# Altium PCB HV.PcbDoc (part 2 of 2)
Units mil, origin at the board's own origin, x right, y up, seen from the top; angles counter-clockwise.
Board outline 2765.94 x 3947.04 mil, 2 copper layers (Top Layer, Bottom Layer); 98 components, 67 nets, 300 pads, 27 vias.
Unrouted connection lines stored in the file: 3.
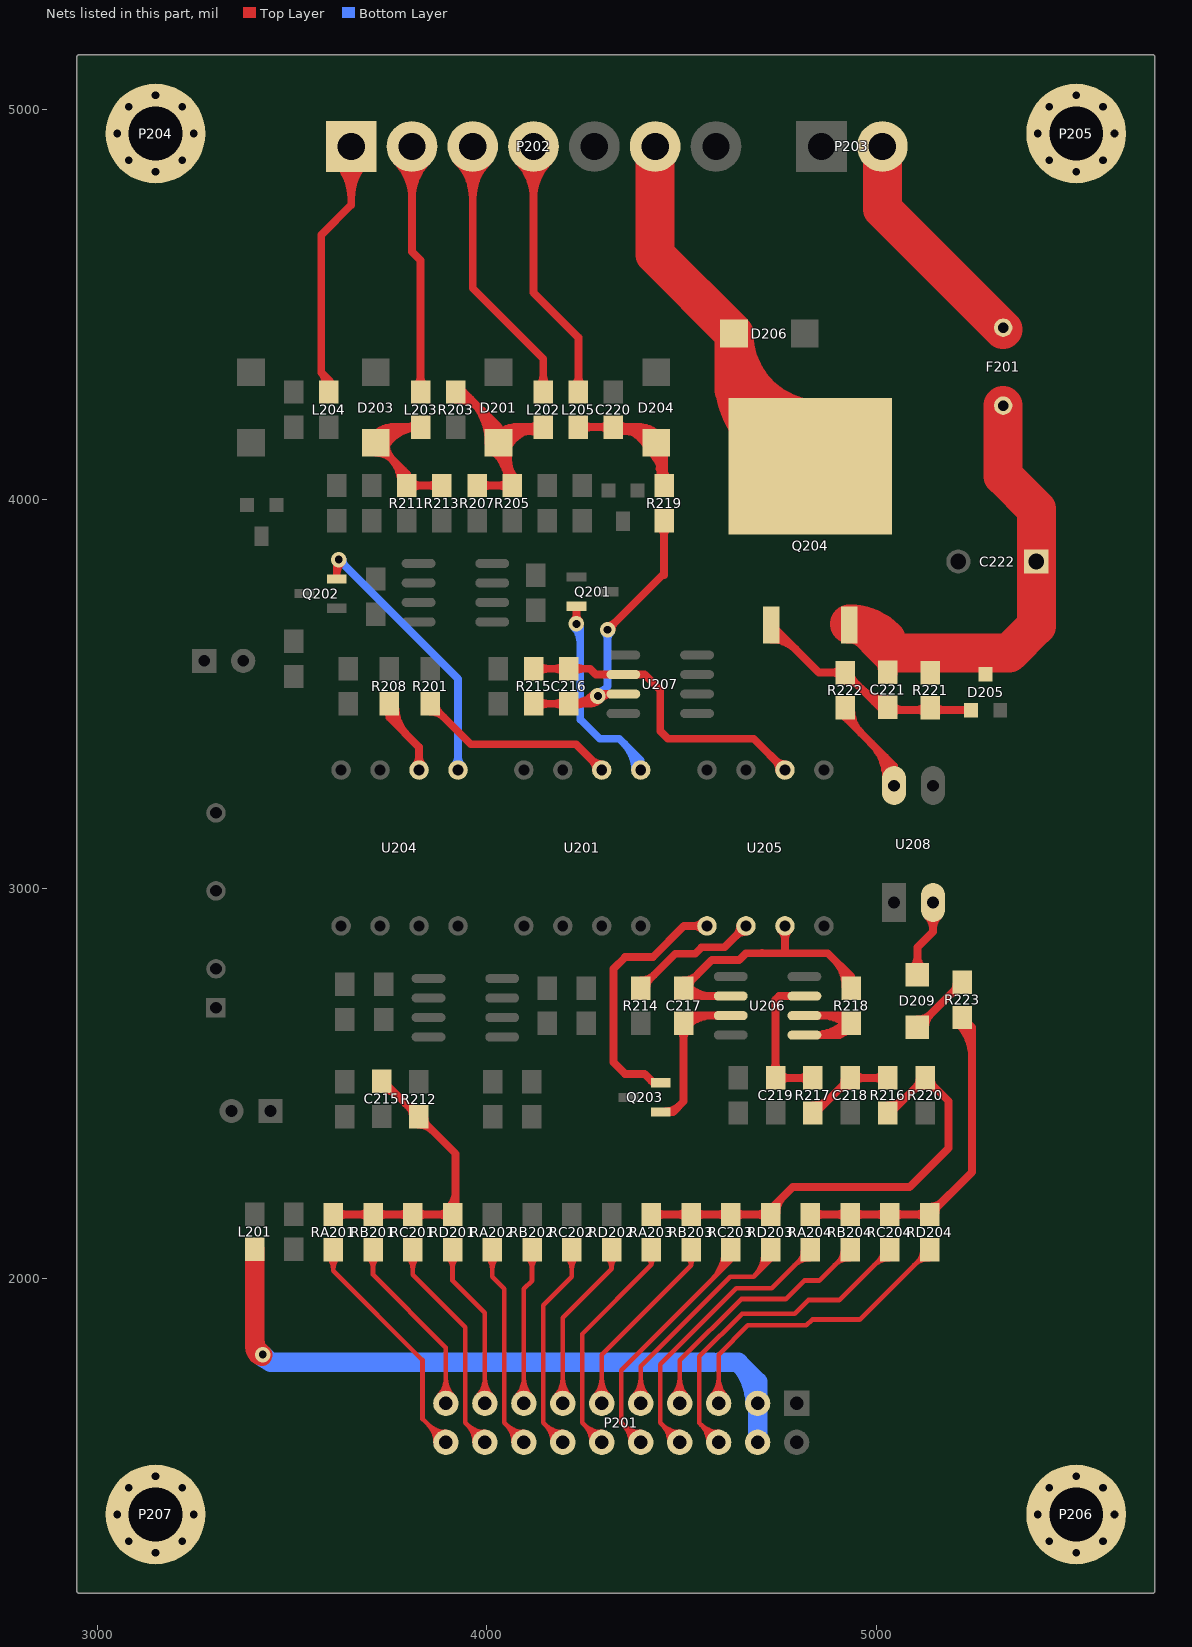
[diagram p2: the nets of this part, all layers, seen from the top]

## Via types
v1: diameter 40, hole 20, Top Layer to Bottom Layer, 26 vias
v2: diameter 50, hole 28, Top Layer to Bottom Layer, 1 vias

## Nets (pads, with @x,y where several pads share a name; then routed paths per layer and width w, separated by ;. In a path a pad name is that pad's centre, name@x,y a point inside that pad or via, vN(x,y) a via of type N, cw(c..) or ccw(c..) an arc to the next point about the centre after c; other vN are vias at no path point) (continued)
NetC215_2: C215.2 R212.2 RA201.1 RB201.1 RC201.1 RD201.1 | length 1282.1
  Top Layer w20: RA201.1@3606.1,2164.45 RB201.1@3708.1,2164.45 RC201.1@3810.1,2164.45 RD201.1@3912.1,2164.45 3920,2172.35 3920,2320 R212.2@3825,2415 3734,2506 C215.2@3730,2506 ; RA201.1@3616.71,2153.84 cw(c3642.32,2128.24) 3642.32,2164.45 cw(c3642.32,2200.66) RA201.1@3616.71,2175.06 ; RB201.1@3697.5,2153.84 ccw(c3671.89,2128.24) 3671.89,2164.45 ccw(c3671.89,2200.66) RB201.1@3697.5,2175.06 ; RB201.1@3718.71,2153.84 cw(c3744.32,2128.24) 3744.32,2164.45 cw(c3744.32,2200.66) RB201.1@3718.71,2175.06 ; C215.2@3730,2486 cw(c3730,2428.06) 3770.97,2469.03 ; 3790.86,2449.14 ccw(c3825,2483.28) R212.2@3825,2435 ; RC201.1@3799.5,2153.84 ccw(c3773.89,2128.24) 3773.89,2164.45 ccw(c3773.89,2200.66) RC201.1@3799.5,2175.06 ; R212.2@3802.93,2437.07 cw(c3785.86,2420) R212.2@3810,2420 ; RC201.1@3820.71,2153.84 cw(c3846.32,2128.24) 3846.32,2164.45 cw(c3846.32,2200.66) RC201.1@3820.71,2175.06 ; R212.2@3825,2395 cw(c3825,2346.72) 3859.14,2380.86 ; R212.2@3840,2410 ccw(c3864.14,2410) R212.2@3847.07,2392.93 ; RD201.1@3901.5,2153.84 ccw(c3875.89,2128.24) 3875.89,2164.45 ccw(c3875.89,2200.66) RD201.1@3901.5,2175.06 ; RD201.1@3901.5,2180.06 ccw(c3856.82,2224.73) 3920,2224.73
NetC216_1: C216.1 R215.2 U205.6 U207.6 | length 1016.7
  Top Layer w20: R215.2@4130.61,3554.39 cw(c4156.21,3528.79) 4156.21,3565 cw(c4156.21,3601.21) R215.2@4130.61,3575.61 ; 4145,3565 C216.1@4210,3565 4265,3565 4280,3550 U207.6@4350.51,3550 4405,3550 4445,3510 4445,3405 4465,3385 4685,3385 U205.6@4765,3305 ; C216.1@4199.39,3554.39 ccw(c4173.79,3528.79) 4173.79,3565 ccw(c4173.79,3601.21) C216.1@4199.39,3575.61 ; C216.1@4220.61,3554.39 cw(c4246.21,3528.79) 4246.21,3565 cw(c4246.21,3601.21) C216.1@4220.61,3575.61 ; U205.6@4750,3305 ccw(c4713.79,3305) 4739.39,3330.61 ccw(c4765,3356.21) U205.6@4765,3320
NetC216_2: C216.2 R215.1 R219.1 U207.7 | length 1295.1
  Top Layer w20: R215.1@4120,3475 C216.2@4210,3475 4265,3475 v1(4285,3495) ; R215.1@4130.61,3464.39 cw(c4156.21,3438.79) 4156.21,3475 cw(c4156.21,3511.21) R215.1@4130.61,3485.61 ; C216.2@4199.39,3464.39 ccw(c4173.79,3438.79) 4173.79,3475 ccw(c4173.79,3511.21) C216.2@4199.39,3485.61 ; C216.2@4212.57,3475 ccw(c4212.57,3567.43) v1@4277.93,3502.07 ; C216.2@4220.61,3464.39 cw(c4246.21,3438.79) 4246.21,3475 cw(c4246.21,3511.21) C216.2@4220.61,3485.61 ; 4260.86,3475 ccw(c4260.86,3519.14) 4292.07,3487.93 cw(c4321.21,3458.79) U207.7@4321.21,3500 ; v1@4275,3495 cw(c4250.86,3495) 4267.93,3477.93 cw(c4285,3460.86) v1@4285,3485 ; v1(4310,3665) 4455,3810 ; v1@4310,3675 ccw(c4310,3699.14) 4327.07,3682.07 ccw(c4344.14,3665) v1@4320,3665 ; U207.7@4350.51,3500 v1@4290,3500 ; R219.1@4444.39,3929.39 cw(c4418.79,3903.79) 4455,3903.79 cw(c4491.21,3903.79) R219.1@4465.61,3929.39 ; 4455,3805 4455,3810 ; R219.1@4455,3945 4455,3810 ; v1(4285,3495) v1@4290,3500 ; v1(4285,3495) 4285,3500 v1@4290,3500
  Bottom Layer w20: v1(4285,3495) 4310,3520 v1(4310,3665) ; v1@4285,3505 ccw(c4285,3529.14) 4302.07,3512.07 ccw(c4319.14,3495) v1@4295,3495 ; v1@4302.93,3657.93 cw(c4285.86,3640.86) 4310,3640.86 cw(c4334.14,3640.86) v1@4317.07,3657.93
NetC217_1: C217.1 R218.1 U205.3 U206.6 | length 1080.1
  Top Layer w20: C217.1@4501.46,2736.46 ccw(c4529.14,2764.14) C217.1@4529.14,2725 ; C217.1@4505,2765 ccw(c4505,2813.28) 4539.14,2779.14 ; C217.1@4515.61,2750.61 ccw(c4577.43,2812.43) 4577.43,2725 ; C217.1@4520,2750 cw(c4544.14,2750) C217.1@4527.07,2767.07 ; U206.6@4626.02,2725 4525,2725 C217.1@4505,2745 4577.5,2817.5 4647.5,2817.5 4665,2835 4705,2835 ; 4706.18,2836.18 4705,2835 ; U205.3@4754.39,2894.39 cw(c4728.79,2868.79) 4765,2868.79 cw(c4801.21,2868.79) U205.3@4775.61,2894.39 ; U205.3@4765,2905 4765,2835 ; 4891.59,2818.41 cw(c4823.02,2749.83) R218.1@4920,2749.83 ; 4925.74,2784.26 cw(c4891.3,2749.83) R218.1@4940,2749.83 ; R218.1@4927.86,2763.02 ccw(c4921.38,2775) 4935,2775 ; R218.1@4935,2744.83 4935,2775 ; R218.1@4942.14,2763.02 cw(c4948.62,2775) 4935,2775 ; 4705,2835 4765,2835 ; 4765,2835 4875,2835 4935,2775
NetC217_2: C217.2 Q203.1 U206.7 | length 598.9
  Top Layer w20: Q203.1@4446.34,2427.6 4477.6,2427.6 4505,2455 C217.2@4505,2655 ; Q203.1@4460.12,2429.41 ccw(c4460.12,2475.98) 4493.05,2443.05 ; C217.2@4494.39,2639.39 cw(c4468.79,2613.79) 4505,2613.79 cw(c4541.21,2613.79) C217.2@4515.61,2639.39 ; C217.2@4501.46,2663.54 cw(c4529.14,2635.86) C217.2@4529.14,2675 ; C217.2@4505,2661.72 C217.2@4505,2655 ; C217.2@4515.61,2649.39 cw(c4577.43,2587.57) 4577.43,2675 ; U206.7@4626.02,2675 4525,2675 C217.2@4505,2655
NetC218_2: C218.2 R216.1 R217.2 | length 449.6
  Top Layer w20: R217.2@4837,2425 4843.17,2425 4933.17,2515 R216.1@5029,2515 ; R217.2@4837,2445 ccw(c4837,2508.18) 4881.68,2463.51 ; 4899.44,2481.27 cw(c4933,2447.72) C218.2@4933,2495.17 ; C218.2@4910.69,2492.51 ccw(c4893.03,2510.17) C218.2@4918,2510.17 ; C218.2@4943.61,2504.57 cw(c4968.8,2479.37) 4968.8,2515 ; C218.2@4943.61,2525.78 ccw(c4969.63,2551.8) 4969.63,2515 ; R216.1@5018.39,2504.39 ccw(c4992.79,2478.79) 4992.79,2515 ccw(c4992.79,2551.21) R216.1@5018.39,2525.61
NetC219_2: C219.2 R217.1 U206.3 | length 545.3
  Top Layer w20: C219.2@4730.39,2530.78 ccw(c4704.79,2556.38) 4741,2556.38 ccw(c4777.21,2556.38) C219.2@4751.61,2530.78 ; C219.2@4751.61,2504.57 cw(c4776.8,2479.37) 4776.8,2515 ; C219.2@4751.61,2525.78 ccw(c4777.63,2551.8) 4777.63,2515 ; U206.3@4815,2725 4750,2725 4741,2716 C219.2@4741,2515.17 4741.17,2515 R217.1@4837,2515 ; R217.1@4826.39,2504.39 ccw(c4800.79,2478.79) 4800.79,2515 ccw(c4800.79,2551.21) R217.1@4826.39,2525.61
NetC220_2: C220.2 D204.1 L205.2 R219.2 | length 1200.4
  Top Layer w20: L205.2@4235,4185 C220.2@4325,4185 ; L205.2@4245.61,4174.39 cw(c4271.21,4148.79) 4271.21,4185 cw(c4271.21,4221.21) L205.2@4245.61,4195.61 ; C220.2@4314.39,4174.39 ccw(c4288.79,4148.79) 4288.79,4185 ccw(c4288.79,4221.21) C220.2@4314.39,4195.61 ; C220.2@4333.79,4167.84 cw(c4356.5,4136.41) 4366.54,4173.87 ; C220.2@4335.61,4174.39 cw(c4361.21,4148.79) 4361.21,4185 cw(c4361.21,4221.21) C220.2@4335.61,4195.61 ; C220.2@4337.99,4187.5 ccw(c4355.07,4197.36) C220.2@4349.96,4178.31 ; 4358.34,4185 cw(c4358.34,4103.55) D204.1@4430.21,4141.89 ; 4391.68,4185 cw(c4391.68,4121.34) D204.1@4447.85,4151.31 ; D204.1@4409.6,4145.71 ccw(c4357.73,4148.28) 4394.45,4185 ; D204.1@4412.56,4132.48 ccw(c4325,4085.76) C220.2@4325,4185 ; D204.1@4417.02,4126.46 cw(c4325.31,4034.76) R219.2@4455,4034.76 ; D204.1@4431.16,4140.61 cw(c4373.6,4083.05) 4455,4083.05 ; D204.1@4433.74,4169.85 cw(c4431.17,4221.72) 4394.45,4185 ; D204.1@4435,4125 D204.1@4435,4140 ; R219.2@4442.01,4047.5 ccw(c4414.66,4063.29) 4445.17,4071.47 ; 4443.47,4077.79 ccw(c4482.92,4088.36) R219.2@4462.5,4052.99 ; R219.2@4444.39,4050.61 ccw(c4418.79,4076.21) 4455,4076.21 ccw(c4491.21,4076.21) R219.2@4465.61,4050.61 ; R219.2@4455,4035 4455,4120 D204.1@4435,4140 ; C220.2@4325,4185 4394.45,4185 ; 4394.45,4185 D204.1@4435,4144.45 D204.1@4435,4140
NetC221_1: C221.1 D205.1 Q204.1 R221.1 R222.1 | length 1132.5
  Top Layer w20: Q204.1@4730,3640.04 cw(c4730,3550.12) 4793.58,3613.7 ; Q204.1@4730,3660.04 cw(c4730,3618.41) 4759.44,3647.85 ; Q204.1@4730,3677.28 4852.28,3555 R222.1@4920,3555 5009,3466 C221.1@5028.63,3466 ; R222.1@4909.39,3544.39 ccw(c4883.79,3518.79) 4883.79,3555 ccw(c4883.79,3591.21) R222.1@4909.39,3565.61 ; R222.1@4920,3535 cw(c4920,3486.72) 4954.14,3520.86 ; R222.1@4935,3550 ccw(c4959.14,3550) R222.1@4942.07,3532.93 ; 4960.98,3514.02 ccw(c5028.63,3581.67) C221.1@5028.63,3486 ; 4995.12,3479.88 ccw(c5028.63,3513.38) C221.1@5028.63,3466 ; C221.1@5039.23,3450.39 cw(c5059.39,3430.24) 5059.39,3458.74 ; C221.1@5039.23,3471.61 ccw(c5070.3,3502.67) 5070.3,3458.74 ; 5098,3458.74 ccw(c5098,3499.25) R221.1@5126.65,3470.61 ; 5104.08,3458.74 cw(c5104.08,3426.83) R221.1@5126.65,3449.39 ; R221.1@5147.86,3449.39 cw(c5170.43,3426.83) 5170.43,3458.74 ; R221.1@5147.86,3470.61 ccw(c5176.51,3499.25) 5176.51,3458.74 ; D205.1@5237.14,3453.28 ccw(c5223.97,3440.11) 5223.97,3458.74 ccw(c5223.97,3477.37) D205.1@5237.14,3464.2 ; D205.1@5242.6,3458.74 5035.89,3458.74 C221.1@5028.63,3466
NetC221_2: C221.2 C222.1 D205.3 F201.2 Q204.3 R221.2 | length 1342.6
  Top Layer w20: C221.2@5028.63,3566.37 C221.2@5043.74,3551.26
  Top Layer w50: Q204.3@4930,3655.04 cw(c4930,3601.34) 4967.97,3639.31 ; Q204.3@4930,3677.28 5028.63,3578.66 5028.63,3566.37 C221.2@5028.63,3556 ; 5016.14,3591.14 cw(c4986,3561) C221.2@5028.63,3561
  Top Layer w100: Q204.3@4930,3680.04 cw(c4930,3547.35) 5023.82,3641.18 ; 5060,3605 5340,3605 5410,3675 C222.1@5410,3840 5410,3975 5325,4060 F201.2@5325,4240
NetD201_1: D201.1 L202.1 R203.2 R205.2 R207.2 | length 1845.3
  Top Layer w20: R203.2@3920,4255 cw(c3920,4158.43) 3988.28,4226.72 ; R203.2@3920,4268.28 R203.2@3920,4275 ; 3954.14,4260.86 ccw(c3920,4226.72) R203.2@3920,4275 ; 3957.91,4257.09 cw(c3845.27,4144.45) D201.1@4004.57,4144.45 ; R207.2@3975,4035 R205.2@4055,4035 ; R207.2@3985.61,4024.39 cw(c4011.21,3998.79) 4011.21,4035 cw(c4011.21,4071.21) R207.2@3985.61,4045.61 ; 3992.05,4222.95 cw(c3913.55,4144.45) D201.1@4024.57,4144.45 ; D201.1@4014.48,4124.3 cw(c3950.98,4041.91) R205.2@4055,4041.91 ; D201.1@4017.42,4151.8 cw(c4075.28,4117.98) 4075.28,4185 ; D201.1@4018.93,4167.35 ccw(c4010.39,4185) 4030,4185 ; 4026.19,4188.81 cw(c3981.84,4144.45) D201.1@4044.57,4144.45 ; D201.1@4026.68,4140.15 cw(c3982.32,4082.57) 4055,4082.57 ; D201.1@4031.26,4169.85 ccw(c4033.83,4221.72) 4070.55,4185 ; D201.1@4033,4127 D201.1@4033,4141.45 ; D201.1@4034.69,4141.71 cw(c4110.14,4097.61) 4110.14,4185 ; 4041.05,4093.98 ccw(c4106.25,4111.45) R205.2@4072.5,4052.99 ; D201.1@4041.07,4167.35 cw(c4049.61,4185) 4030,4185 ; D201.1@4051.96,4131.61 cw(c4145,4077.23) L202.1@4145,4185 4070.55,4185 ; R205.2@4054.39,4024.39 ccw(c4028.79,3998.79) 4028.79,4035 ccw(c4028.79,4071.21) R205.2@4054.39,4045.61 ; 4055,4100.36 ccw(c4125.36,4100.36) R205.2@4075.61,4050.61 ; D201.1@4055.4,4145.71 cw(c4107.27,4148.28) 4070.55,4185 ; 4099.2,4172.73 cw(c4111.76,4125.83) L202.1@4137.16,4167.21 ; L202.1@4120.04,4178.31 ccw(c4114.93,4197.36) L202.1@4132.01,4187.5 ; L202.1@4134.39,4174.39 ccw(c4108.79,4148.79) 4108.79,4185 ccw(c4108.79,4221.21) L202.1@4134.39,4195.61 ; R203.2@3920,4275 3940,4275 4030,4185 ; D201.1@4030,4144.45 4030,4185 ; D201.1@4030,4144.45 D201.1@4033,4141.45 ; D201.1@4030,4144.45 D201.1@4033,4147.45 ; D201.1@4033,4141.45 D201.1@4033,4147.45 ; D201.1@4033,4141.45 4055,4119.45 R205.2@4055,4045 ; D201.1@4033,4147.45 4070.55,4185 ; R205.2@4055,4035 R205.2@4055,4045 ; R205.2@4055,4035 R205.2@4065,4035 R205.2@4055,4045
NetD203_1: D203.1 L203.1 R211.2 R213.2 | length 1103
  Top Layer w20: D203.1@3702.42,4151.8 cw(c3760.28,4117.98) 3760.28,4185 ; D203.1@3715,4119.02 cw(c3715,4057.62) 3758.42,4101.03 cw(c3801.83,4144.45) D203.1@3740.43,4144.45 ; D203.1@3716.26,4169.85 ccw(c3718.83,4221.72) 3755.55,4185 ; D203.1@3719.69,4141.71 cw(c3795.14,4097.61) 3795.14,4185 ; D203.1@3736.96,4131.61 cw(c3830,4077.23) L203.1@3830,4185 3755.55,4185 ; D203.1@3740.4,4145.71 cw(c3792.27,4148.28) 3755.55,4185 ; 3752.11,4107.34 cw(c3684.76,4040) R211.2@3780,4040 ; 3786.25,4073.2 cw(c3753.05,4040) R211.2@3800,4040 ; R211.2@3805.61,4024.39 cw(c3831.21,3998.79) 3831.21,4035 cw(c3831.21,4071.21) R211.2@3805.61,4045.61 ; L203.1@3819.39,4174.39 ccw(c3793.79,4148.79) 3793.79,4185 ccw(c3793.79,4221.21) L203.1@3819.39,4195.61 ; R213.2@3874.39,4024.39 ccw(c3848.79,3998.79) 3848.79,4035 ccw(c3848.79,4071.21) R213.2@3874.39,4045.61 ; R213.2@3885,4035 R211.2@3795,4035 3795,4064.45 D203.1@3715,4144.45 3755.55,4185
NetD206_1: D206.1 P202.6 Q204.2 | length 2022.9
  Top Layer w50: D206.1@4634.45,4425 D206.1@4634.45,4430.55 ; Q204.2@4824.69,4074.45 Q204.2@4895,4144.76
  Top Layer w100: P202.6@4431.99,4905 4431.99,4627.46 D206.1@4634.45,4425 ; 4634.45,4306.15 ccw(c4833.95,4306.15) Q204.2@4799.86,4109.59 ; 4640.63,4274.13 ccw(c4795.55,4429.05) Q204.2@4795.55,4209.96 ; Q204.2@4675.41,4119.99 ccw(c4519.77,4165.62) 4634.46,4280.31 ; Q204.2@4816.94,4208.12 cw(c4854.56,4424.99) D206.1@4634.45,4425 ; Q204.2@4830,4084.76 4634.45,4280.31 ; 4634.45,4280.31 D206.1@4634.45,4425
NetD209_1: D209.1 U208.2 | length 357.1
  Top Layer w20: D209.1@5090.86,2794.14 ccw(c5056.72,2828.28) 5105,2828.28 ccw(c5153.28,2828.28) D209.1@5119.14,2794.14 ; D209.1@5105,2780 5105,2850 5145,2890 U208.2@5145,2965 ; U208.2@5130.15,2931.15 cw(c5094.3,2895.3) 5145,2895.3 cw(c5195.7,2895.3) U208.2@5159.85,2931.15
NetD209_2: D209.2 R223.2 | length 295.4
  Top Layer w20: D209.2@5105,2645 R223.2@5220,2760 ; D209.2@5105,2665 ccw(c5105,2713.28) 5139.14,2679.14 ccw(c5173.28,2645) D209.2@5125,2645 ; 5185.86,2725.86 cw(c5220,2691.72) R223.2@5220,2740 ; R223.2@5197.93,2737.93 ccw(c5180.86,2755) R223.2@5205,2755
NetF201_1: F201.1 P203.2 | length 598.4
  Top Layer w100: P203.2@5015,4905 5015,4745 F201.1@5325,4435
NetL201_1: L201.1 P201.3 P201.4 | length 1970.1
  Top Layer w50: 3405,1841.21 ccw(c3461.21,1841.21) v1@3421.46,1801.46 ; L201.1@3405,2075 3405,1825 ; v1@3423.6,1800.2 cw(c3430.83,1825) 3405,1825 ; v1(3425,1805) 3405,1825
  Bottom Layer w12: 4580,1785 4595,1785
  Bottom Layer w50: v1@3421.46,1801.46 ccw(c3461.21,1841.21) 3461.21,1785 ; v1(3425,1805) 3445,1785 4580,1785 ; 4595,1785 4645,1785 ; P201.3@4687.5,1680.12 ccw(c4542.37,1682.36) 4645,1785 ; P201.4@4695,1580 P201.3@4695,1680 4695,1735 4645,1785
NetL202_2: L202.2 P202.3 | length 1103.2
  Top Layer w20: P202.3@3925.1,4866.11 cw(c3831.21,4772.22) 3963.99,4772.22 cw(c4096.77,4772.22) P202.3@4002.88,4866.11 ; P202.3@3939.24,4880.25 cw(c3879.49,4820.5) 3963.99,4820.5 cw(c4048.49,4820.5) P202.3@3988.74,4880.25 ; P202.3@3963.99,4905 3963.99,4541.01 4145,4360 L202.2@4145,4275 ; L202.2@4134.39,4290.61 ccw(c4108.79,4316.21) 4145,4316.21 ccw(c4181.21,4316.21) L202.2@4155.61,4290.61
NetL203_2: L203.2 P202.2 | length 1037.3
  Top Layer w20: P202.2@3769.1,4866.11 cw(c3675.21,4772.22) 3807.99,4772.22 cw(c3940.77,4772.22) P202.2@3846.88,4866.11 ; P202.2@3783.24,4880.25 cw(c3723.49,4820.5) 3807.99,4820.5 cw(c3892.49,4820.5) P202.2@3832.74,4880.25 ; P202.2@3807.99,4905 3807.99,4635 3830,4612.99 L203.2@3830,4275 ; L203.2@3819.39,4290.61 ccw(c3793.79,4316.21) 3830,4316.21 ccw(c3866.21,4316.21) L203.2@3840.61,4290.61
NetL204_1: L204.1 P202.1 | length 1082.6
  Top Layer w20: L204.1@3581.5,4286.53 ccw(c3551.2,4301.2) 3575,4325 ; 3594.89,4305.11 cw(c3578.01,4288.22) L204.1@3599.5,4277.82 ; L204.1@3595,4275 3595,4305 3575,4325 ; P202.1@3613.1,4866.11 cw(c3519.21,4772.22) 3651.99,4772.22 cw(c3784.77,4772.22) P202.1@3690.88,4866.11 ; P202.1@3627.24,4880.25 cw(c3567.49,4820.5) 3651.99,4820.5 cw(c3736.49,4820.5) P202.1@3676.74,4880.25 ; P202.1@3651.99,4905 3651.99,4755 3575,4678.01 3575,4325
NetL205_1: L205.1 P202.4 | length 1075.8
  Top Layer w20: P202.4@4081.1,4866.11 cw(c3987.21,4772.22) 4119.99,4772.22 cw(c4252.77,4772.22) P202.4@4158.88,4866.11 ; P202.4@4095.24,4880.25 cw(c4035.49,4820.5) 4119.99,4820.5 cw(c4204.49,4820.5) P202.4@4144.74,4880.25 ; P202.4@4119.99,4905 4119.99,4530.01 4235,4415 L205.1@4235,4275 ; L205.1@4224.39,4290.61 ccw(c4198.79,4316.21) 4235,4316.21 ccw(c4271.21,4316.21) L205.1@4245.61,4290.61
NetP201_5: P201.5 RD204.2 | length 1028
  Top Layer w12: P201.5@4576.26,1698.74 ccw(c4531.02,1743.98) 4595,1743.98 ccw(c4658.98,1743.98) P201.5@4613.74,1698.74 ; P201.5@4584.75,1690.25 ccw(c4559.99,1715.01) 4595,1715.01 ccw(c4630.01,1715.01) P201.5@4605.25,1690.25 ; P201.5@4595,1680 4595,1805 4670,1880 4820,1880 4835,1895 4956.65,1895 RD204.2@5136.1,2074.45 ; 5095.13,2033.48 cw(c5136.1,1992.51) RD204.2@5136.1,2050.45 ; 5107.2,2045.55 ccw(c5083.3,2069.45) RD204.2@5117.1,2069.45 ; RD204.2@5115.62,2053.96 cw(c5136.1,2033.48) RD204.2@5136.1,2062.45
NetP201_6: P201.6 RC204.2 | length 1093.4
  Top Layer w12: P201.6@4568.5,1580 ccw(c4504.52,1580) 4549.76,1625.24 ccw(c4595,1670.48) P201.6@4595,1606.5 ; P201.6@4580.5,1580 ccw(c4545.49,1580) 4570.25,1604.75 ccw(c4595,1629.51) P201.6@4595,1594.5 ; P201.6@4595,1580 4545.47,1629.53 4545.47,1800.47 4655,1910 4790,1910 4825,1945 4904.65,1945 RC204.2@5034.1,2074.45 ; 4993.13,2033.48 cw(c5034.1,1992.51) RC204.2@5034.1,2050.45 ; 5005.2,2045.55 ccw(c4981.3,2069.45) RC204.2@5015.1,2069.45 ; RC204.2@5013.62,2053.96 cw(c5034.1,2033.48) RC204.2@5034.1,2062.45
NetP201_7: P201.7 RB204.2 | length 915.2
  Top Layer w12: P201.7@4476.26,1698.74 ccw(c4431.02,1743.98) 4495,1743.98 ccw(c4558.98,1743.98) P201.7@4513.74,1698.74 ; P201.7@4484.75,1690.25 ccw(c4459.99,1715.01) 4495,1715.01 ccw(c4530.01,1715.01) P201.7@4505.25,1690.25 ; P201.7@4495,1680 4495,1790 4652.5,1947.5 4767.5,1947.5 4815,1995 4852.65,1995 RB204.2@4932.1,2074.45 ; 4891.13,2033.48 cw(c4932.1,1992.51) RB204.2@4932.1,2050.45 ; 4903.2,2045.55 ccw(c4879.3,2069.45) RB204.2@4913.1,2069.45 ; RB204.2@4911.62,2053.96 cw(c4932.1,2033.48) RB204.2@4932.1,2062.45
NetP201_8: P201.8 RA204.2 | length 978.1
  Top Layer w12: P201.8@4468.5,1580 ccw(c4404.52,1580) 4449.76,1625.24 ccw(c4495,1670.48) P201.8@4495,1606.5 ; P201.8@4480.5,1580 ccw(c4445.49,1580) 4470.25,1604.75 ccw(c4495,1629.51) P201.8@4495,1594.5 ; P201.8@4495,1580 4445,1630 4445,1780 4640,1975 4730.65,1975 RA204.2@4830.1,2074.45 ; 4789.13,2033.48 cw(c4830.1,1992.51) RA204.2@4830.1,2050.45 ; 4801.2,2045.55 ccw(c4777.3,2069.45) RA204.2@4811.1,2069.45 ; RA204.2@4809.62,2053.96 cw(c4830.1,2033.48) RA204.2@4830.1,2062.45
NetP201_9: P201.9 RD203.2 | length 872.3
  Top Layer w12: P201.9@4376.26,1698.74 ccw(c4331.02,1743.98) 4395,1743.98 ccw(c4458.98,1743.98) P201.9@4413.74,1698.74 ; P201.9@4384.75,1690.25 ccw(c4359.99,1715.01) 4395,1715.01 ccw(c4430.01,1715.01) P201.9@4405.25,1690.25 ; P201.9@4395,1680 4395,1775 4625,2005 4685,2005 ; 4703.93,2023.93 ccw(c4662.21,2065.65) RD203.2@4721.11,2069.05 ; RD203.2@4709.13,2068.36 cw(c4626.42,2063.59) 4685,2005 ; 4722.86,2042.86 ccw(c4698,2067.71) RD203.2@4733.09,2069.74 ; RD203.2@4728.1,2074.45 4728.1,2048.1 4685,2005
NetP201_10: P201.10 RC203.2 | length 959.7
  Top Layer w12: P201.10@4368.5,1580 ccw(c4304.52,1580) 4349.76,1625.24 ccw(c4395,1670.48) P201.10@4395,1606.5 ; P201.10@4380.5,1580 ccw(c4345.49,1580) 4370.25,1604.75 ccw(c4395,1629.51) P201.10@4395,1594.5 ; P201.10@4395,1580 4345,1630 4345,1765 4626.1,2046.1 RC203.2@4626.1,2074.45 ; 4577.16,1997.16 ccw(c4504.87,2069.45) RC203.2@4607.1,2069.45 ; 4597.64,2017.64 ccw(c4545.84,2069.45) RC203.2@4619.1,2069.45 ; 4618.13,2038.13 ccw(c4586.81,2069.45) RC203.2@4631.1,2069.45
NetP201_11: P201.11 RB203.2 | length 690.9
  Top Layer w12: P201.11@4276.26,1698.74 ccw(c4231.02,1743.98) 4295,1743.98 ccw(c4358.98,1743.98) P201.11@4313.74,1698.74 ; P201.11@4284.75,1690.25 ccw(c4259.99,1715.01) 4295,1715.01 ccw(c4330.01,1715.01) P201.11@4305.25,1690.25 ; P201.11@4295,1680 4295,1805 4524.1,2034.1 ; RB203.2@4513.62,2053.6 cw(c4500.73,2034.1) 4524.1,2034.1 ; RB203.2@4524.1,2074.45 4524.1,2034.1 ; RB203.2@4534.58,2053.6 ccw(c4547.48,2034.1) 4524.1,2034.1
NetP201_12: P201.12 RA203.2 | length 787.8
  Top Layer w12: P201.12@4268.5,1580 ccw(c4204.52,1580) 4249.76,1625.24 ccw(c4295,1670.48) P201.12@4295,1606.5 ; P201.12@4280.5,1580 ccw(c4245.49,1580) 4270.25,1604.75 ccw(c4295,1629.51) P201.12@4295,1594.5 ; P201.12@4295,1580 4245,1630 4245,1857.9 4422.1,2035 ; RA203.2@4411.97,2053.38 cw(c4400.38,2035) 4422.1,2035 ; RA203.2@4422.1,2074.45 4422.1,2035 ; RA203.2@4432.24,2053.38 ccw(c4443.83,2035) 4422.1,2035
NetP201_13: P201.13 RD202.2 | length 670.4
  Top Layer w12: P201.13@4176.26,1698.74 ccw(c4131.02,1743.98) 4195,1743.98 ccw(c4258.98,1743.98) P201.13@4213.74,1698.74 ; P201.13@4184.75,1690.25 ccw(c4159.99,1715.01) 4195,1715.01 ccw(c4230.01,1715.01) P201.13@4205.25,1690.25 ; P201.13@4195,1680 4195,1899.9 4320.1,2025 ; RD202.2@4306.97,2055.71 cw(c4277.62,2025) 4320.1,2025 ; RD202.2@4320.1,2074.45 4320.1,2025 ; RD202.2@4333.23,2055.71 ccw(c4362.59,2025) 4320.1,2025
NetP201_14: P201.14 RC202.2 | length 773
  Top Layer w12: P201.14@4168.5,1580 ccw(c4104.52,1580) 4149.76,1625.24 ccw(c4195,1670.48) P201.14@4195,1606.5 ; P201.14@4180.5,1580 ccw(c4145.49,1580) 4170.25,1604.75 ccw(c4195,1629.51) P201.14@4195,1594.5 ; P201.14@4195,1580 4145,1630 4145,1931.9 4218.1,2005 RC202.2@4218.1,2074.45 ; RC202.2@4204.67,2056.01 cw(c4172.23,2023.58) 4218.1,2023.58 cw(c4263.97,2023.58) RC202.2@4231.54,2056.01
NetP201_15: P201.15 RB202.2 | length 630.7
  Top Layer w12: P201.15@4076.26,1698.74 ccw(c4031.02,1743.98) 4095,1743.98 ccw(c4158.98,1743.98) P201.15@4113.74,1698.74 ; P201.15@4084.75,1690.25 ccw(c4059.99,1715.01) 4095,1715.01 ccw(c4130.01,1715.01) P201.15@4105.25,1690.25 ; P201.15@4095,1680 4095,1973.9 4116.1,1995 RB202.2@4116.1,2074.45 ; RB202.2@4102.67,2056.01 cw(c4070.23,2023.58) 4116.1,2023.58 cw(c4161.97,2023.58) RB202.2@4129.54,2056.01
NetP201_16: P201.16 RA202.2 | length 755.5
  Top Layer w12: RA202.2@4000.67,2056.01 cw(c3968.23,2023.58) 4014.1,2023.58 cw(c4059.97,2023.58) RA202.2@4027.54,2056.01 ; RA202.2@4014.1,2074.45 4014.1,2005 4045,1974.1 4045,1630 P201.16@4095,1580 ; P201.16@4068.5,1580 ccw(c4004.52,1580) 4049.76,1625.24 ccw(c4095,1670.48) P201.16@4095,1606.5 ; P201.16@4080.5,1580 ccw(c4045.49,1580) 4070.25,1604.75 ccw(c4095,1629.51) P201.16@4095,1594.5
NetP201_17: P201.17 RD201.2 | length 656.3
  Top Layer w12: RD201.2@3898.67,2056.01 cw(c3866.23,2023.58) 3912.1,2023.58 cw(c3957.97,2023.58) RD201.2@3925.54,2056.01 ; RD201.2@3912.1,2074.45 3912.1,1995 3995,1912.1 P201.17@3995,1680 ; P201.17@3976.26,1698.74 ccw(c3931.02,1743.98) 3995,1743.98 ccw(c4058.98,1743.98) P201.17@4013.74,1698.74 ; P201.17@3984.75,1690.25 ccw(c3959.99,1715.01) 3995,1715.01 ccw(c4030.01,1715.01) P201.17@4005.25,1690.25
NetP201_18: P201.18 RC201.2 | length 798.6
  Top Layer w12: RC201.2@3796.67,2056.01 cw(c3764.23,2023.58) 3810.1,2023.58 cw(c3855.97,2023.58) RC201.2@3823.54,2056.01 ; RC201.2@3810.1,2074.45 3810.1,2010 3945,1875.1 3945,1630 P201.18@3995,1580 ; P201.18@3968.5,1580 ccw(c3904.52,1580) 3949.76,1625.24 ccw(c3995,1670.48) P201.18@3995,1606.5 ; P201.18@3980.5,1580 ccw(c3945.49,1580) 3970.25,1604.75 ccw(c3995,1629.51) P201.18@3995,1594.5
NetP201_19: P201.19 RB201.2 | length 699.4
  Top Layer w12: RB201.2@3694.67,2056.01 cw(c3662.23,2023.58) 3708.1,2023.58 cw(c3753.97,2023.58) RB201.2@3721.54,2056.01 ; RB201.2@3708.1,2074.45 3708.1,2010 3895,1823.1 P201.19@3895,1680 ; P201.19@3876.26,1698.74 ccw(c3831.02,1743.98) 3895,1743.98 ccw(c3958.98,1743.98) P201.19@3913.74,1698.74 ; P201.19@3884.75,1690.25 ccw(c3859.99,1715.01) 3895,1715.01 ccw(c3930.01,1715.01) P201.19@3905.25,1690.25
NetP201_20: P201.20 RA201.2 | length 841.6
  Top Layer w12: RA201.2@3592.67,2056.01 cw(c3560.23,2023.58) 3606.1,2023.58 cw(c3651.97,2023.58) RA201.2@3619.54,2056.01 ; RA201.2@3606.1,2074.45 3606.1,2020 3835,1791.1 3835,1640 P201.20@3895,1580 ; P201.20@3868.5,1580 ccw(c3804.52,1580) 3849.76,1625.24 ccw(c3895,1670.48) P201.20@3895,1606.5 ; P201.20@3880.5,1580 ccw(c3845.49,1580) 3870.25,1604.75 ccw(c3895,1629.51) P201.20@3895,1594.5
NetP204_1: P204.1 P204.2 P204.3 P204.4 P204.5 P204.6 P204.7 P204.8 P204.9
NetP205_1: P205.1 P205.2 P205.3 P205.4 P205.5 P205.6 P205.7 P205.8 P205.9
NetP206_1: P206.1 P206.2 P206.3 P206.4 P206.5 P206.6 P206.7 P206.8 P206.9
NetP207_1: P207.1 P207.2 P207.3 P207.4 P207.5 P207.6 P207.7 P207.8 P207.9
NetQ201_2: Q201.2 U201.1 | length 715.3
  Top Layer w20: v1@4222.93,3687.07 ccw(c4205.86,3704.14) 4230,3704.14 ccw(c4254.14,3704.14) v1@4237.07,3687.07 ; v1(4230,3680) Q201.2@4230,3725.2
  Bottom Layer w20: v1@4222.93,3672.93 cw(c4181.72,3631.72) 4240,3631.72 ; v1(4230,3680) 4240,3670 4240,3435 4290,3385 4340,3385 4395,3330 U201.1@4395,3305 ; 4351.72,3373.28 cw(c4283.43,3305) U201.1@4380,3305 ; 4385.86,3339.14 cw(c4351.72,3305) U201.1@4400,3305
NetQ202_2: Q202.2 U204.1 | length 846.1
  Top Layer w20: Q202.2@3615,3795 3615,3840 v1(3620,3845) ; 3615,3808.79 cw(c3656.21,3808.79) v1@3627.07,3837.93
  Bottom Layer w20: v1@3620,3835 cw(c3620,3810.86) 3637.07,3827.93 cw(c3654.14,3845) v1@3630,3845 ; v1(3620,3845) 3926.18,3538.82 U204.1@3926.18,3305 ; U204.1@3915.57,3315.61 ccw(c3889.97,3341.21) 3926.18,3341.21 ccw(c3962.39,3341.21) U204.1@3936.79,3315.61
NetQ203_2: Q203.2 U205.1 | length 738.4
  Top Layer w20: Q203.2@4421,2509 ccw(c4432.56,2520.56) Q203.2@4432.56,2504.21 ; Q203.2@4446.34,2502.4 4427.6,2502.4 4405,2525 4355,2525 4325,2555 4325,2795 4355,2825 4426.18,2825 4506.18,2905 U205.1@4565,2905 ; U205.1@4554.39,2894.39 ccw(c4528.79,2868.79) 4528.79,2905 ccw(c4528.79,2941.21) U205.1@4554.39,2915.61
NetR201_2: R201.2 U201.2 | length 624.2
  Top Layer w20: R201.2@3855,3455 cw(c3855,3406.72) 3889.14,3440.86 ; R201.2@3855,3475 3958.82,3371.18 4228.82,3371.18 U201.2@4295,3305 ; R201.2@3870,3470 ccw(c3894.14,3470) R201.2@3877.07,3452.93 ; U201.2@4280,3305 ccw(c4243.79,3305) 4269.39,3330.61 ccw(c4295,3356.21) U201.2@4295,3320
NetR208_2: R208.2 U204.2 | length 432.9
  Top Layer w20: R208.2@3741,3458 cw(c3727.5,3440) 3750,3440 ; R208.2@3745,3470 ccw(c3805.36,3470) 3762.68,3427.32 ; R208.2@3750,3475 3750,3440 ; R208.2@3759,3458 ccw(c3772.5,3440) 3750,3440 ; R208.2@3765,3470 ccw(c3873.64,3470) 3796.82,3393.18 ; U204.2@3815.57,3315.61 ccw(c3789.97,3341.21) 3826.18,3341.21 ccw(c3862.39,3341.21) U204.2@3836.79,3315.61 ; U204.2@3826.18,3305 3826.18,3363.82 3750,3440
NetR214_2: R214.2 U205.2 | length 450
  Top Layer w20: R214.2@4395,2745 4483.82,2833.82 4535,2833.82 4551.18,2850 4610,2850 U205.2@4665,2905 ; R214.2@4395,2765 ccw(c4395,2813.28) 4429.14,2779.14 ; R214.2@4410,2750 cw(c4434.14,2750) R214.2@4417.07,2767.07 ; U205.2@4650,2905 cw(c4613.79,2905) 4639.39,2879.39 cw(c4665,2853.79) U205.2@4665,2890
NetR216_2: R216.2 R220.2 RA203.1 RB203.1 RC203.1 RD203.1 | length 1728.9
  Top Layer w20: RA203.1@4422.1,2164.45 RB203.1@4524.1,2164.45 RC203.1@4626.1,2164.45 RD203.1@4728.1,2164.45 4728.1,2178.1 4785,2235 5085,2235 5185,2335 5185,2455 R220.2@5125,2515 5035,2425 R216.2@5029,2425 ; RA203.1@4432.71,2153.84 cw(c4458.32,2128.24) 4458.32,2164.45 cw(c4458.32,2200.66) RA203.1@4432.71,2175.06 ; RB203.1@4513.5,2153.84 ccw(c4487.89,2128.24) 4487.89,2164.45 ccw(c4487.89,2200.66) RB203.1@4513.5,2175.06 ; RB203.1@4534.71,2153.84 cw(c4560.32,2128.24) 4560.32,2164.45 cw(c4560.32,2200.66) RB203.1@4534.71,2175.06 ; RC203.1@4615.5,2153.84 ccw(c4589.89,2128.24) 4589.89,2164.45 ccw(c4589.89,2200.66) RC203.1@4615.5,2175.06 ; RC203.1@4636.71,2153.84 cw(c4662.32,2128.24) 4662.32,2164.45 cw(c4662.32,2200.66) RC203.1@4636.71,2175.06 ; RD203.1@4717.5,2153.84 ccw(c4691.89,2128.24) 4691.89,2164.45 ccw(c4691.89,2200.66) RD203.1@4717.5,2175.06 ; RD203.1@4743.1,2169.45 cw(c4800.21,2169.45) 4759.83,2209.83 ; R216.2@5029,2445 ccw(c5029,2507.77) 5073.39,2463.39 ; 5090.86,2480.86 cw(c5125,2446.72) 5125,2495 cw(c5125,2446.71) 5159.14,2480.86 ; R220.2@5102.93,2492.93 ccw(c5085.86,2510) R220.2@5110,2510 ; R220.2@5140,2510 ccw(c5164.14,2510) R220.2@5147.07,2492.93
NetR218_2: R218.2 U206.1 U206.2 | length 563
  Top Layer w20: U206.1@4815,2625 4905.17,2625 ; U206.2@4815,2675 4914.83,2675 R218.2@4935,2654.83 4905.17,2625 ; U206.1@4838.85,2625 ccw(c4838.85,2745.98) R218.2@4924.39,2660.44 ; 4862.16,2675 cw(c4862.16,2586.99) R218.2@4924.39,2649.22 ; 4887.13,2625 ccw(c4887.13,2697.7) R218.2@4938.54,2646.29 ; R218.2@4910.44,2675 cw(c4910.44,2635.27) R218.2@4938.54,2663.36 ; R218.2@4912.93,2632.76 ccw(c4895.86,2649.83) R218.2@4920,2649.83 ; R218.2@4933.37,2634.92 ccw(c4929.61,2600.57) 4905.17,2625
NetR222_2: R222.2 U208.4 | length 505.9
  Top Layer w20: R222.2@4915,3460 ccw(c4951.21,3460) 4925.61,3434.39 ; R222.2@4920,3465 4920,3440 5045,3315 U208.4@5045,3265 ; R222.2@4935,3460 ccw(c5019.5,3460) 4959.75,3400.25 ; 4987.23,3372.77 cw(c4898.46,3284) U208.4@5024,3284 ; 5021.37,3338.63 cw(c4966.75,3284) U208.4@5044,3284
NetR223_1: R223.1 RA204.1 RB204.1 RC204.1 RD204.1 | length 1418.2
  Top Layer w20: RA204.1@4830.1,2164.45 RB204.1@4932.1,2164.45 RC204.1@5034.1,2164.45 RD204.1@5136.1,2164.45 5245,2273.35 5245,2645 R223.1@5220,2670 ; RA204.1@4840.71,2153.84 cw(c4866.32,2128.24) 4866.32,2164.45 cw(c4866.32,2200.66) RA204.1@4840.71,2175.06 ; RB204.1@4921.5,2153.84 ccw(c4895.89,2128.24) 4895.89,2164.45 ccw(c4895.89,2200.66) RB204.1@4921.5,2175.06 ; RB204.1@4942.71,2153.84 cw(c4968.32,2128.24) 4968.32,2164.45 cw(c4968.32,2200.66) RB204.1@4942.71,2175.06 ; RC204.1@5023.5,2153.84 ccw(c4997.89,2128.24) 4997.89,2164.45 ccw(c4997.89,2200.66) RC204.1@5023.5,2175.06 ; RC204.1@5044.71,2153.84 cw(c5070.32,2128.24) 5070.32,2164.45 cw(c5070.32,2200.66) RC204.1@5044.71,2175.06 ; RD204.1@5125.5,2153.84 ccw(c5099.89,2128.24) 5099.89,2164.45 ccw(c5099.89,2200.66) RD204.1@5125.5,2175.06 ; RD204.1@5136.1,2184.45 ccw(c5136.1,2232.73) 5170.24,2198.59 ; RD204.1@5151.1,2169.45 cw(c5175.24,2169.45) RD204.1@5158.17,2186.52 ; R223.1@5209.39,2654.39 cw(c5123.43,2568.43) 5245,2568.43 ; R223.1@5223.54,2668.54 cw(c5171.72,2616.72) 5245,2616.72
pads on no net: D205.2 U201.7 U201.8 U204.7 U204.8 U205.7 U205.8 U207.1 U207.2 U207.3

## Keep-outs
Keep-Out Layer:
  lines w10: 2953.19,1197.99 2953.19,5135 5709.09,5135 5709.09,1197.99 2953.19,1197.99

## Other copper
Top Layer:
  text "VER1.1" at 5530,2000 h78.74 r90
  text "HV_CTRL" at 5420,1955 h78.74 r90

## Silkscreen, mask and mechanical layers (free items; w line width, h text height)
Top Overlay:
  lines w10: 3005,3875 4130,3875 4150,3875 4150,3895 ; 3095,3470 3500,3470 3585,3400 3860,3400 3860,3420 ; 3250,3420 3250,3470 ; 3645,3400 3645,3420 ; 3755,3400 3755,3420 ; 4205,3900 4205,3880 4555,3880 4575,3880 4575,3710 ; 4350,3880 4350,3895 ; 4495,3880 4495,3900
  text "VS" at 3775,4625 h40
  text "IS" at 3935,4625 h40
  text "VC" at 4085,4625 h40
  text "+5V" at 3565,4620 h40
  text "G" at 4265,4620 h40
  text "-" at 4575,4610 h78.74
  text "+" at 4405,4605 h78.74
  text "-" at 4840,4600 h78.74
  text "+" at 5005,4600 h78.74